# EAGLE board simulation file (EAGLE 9.7.0)

Size 248.9 x 140.5 mm. Coordinates in mm from the lower left corner, seen from the top.
Outline: 0,0 248.9,0 248.9,140.5 0,140.5 0,0
Copper layers (1*16): Top 0.035mm / dielectric 1.5mm / Bottom 0.035mm
Design rules "default": minimum track width 6mil, minimum drill 0.35mm, track to track 6mil, track to pad 6mil, pad to pad 6mil, via to via 6mil, smd to smd 6mil, copper to edge 40mil, drill to drill 6mil, minimum pad ring 10mil, minimum via ring 8mil, stop-mask expansion 4mil, vias tented up to drill 0mil, thermal gap 10mil

## Footprints (pad centres in the part's own frame; a part is rotated, then mirrored left to right if it is on the bottom)
DIODE-AXIAL = drill 1: 1 -5.08,0; 2 5.08,0
LEDRD254W60D565H860B_G = drill 0.981 pad 1.581: 1 -1.27,0; 2 1.27,0
HC-SR04 = drill 1.016 long: 1 -3.81,0; 2 -1.27,0; 3 1.27,0; 4 3.81,0
MOTOR = drill 1.118 pad 3.15 octagon: + 2.54,0; - -2.54,0
RESAD1016W63L850D250B = drill 0.83 pad 1.43: 1 -5.08,0; 2 5.08,0
SEN-13322 = drill 1.016 long: 1 -2.54,0; 2 0,0; 3 2.54,0
SG90 = drill 1.016 long: 1 -2.54,0; 2 0,0; 3 2.54,0
TO92 = drill 0.813 octagon: 1 -1.27,0; 2 0,1.905; 3 1.27,0
ARDUINO-UNO-R3-SHIELD = drill 1.016 pad 1.88: 3.3V 24.13,-2.54; 5V 24.13,0; A0 24.13,12.7; A1 24.13,15.24; A2 24.13,17.78; A3 24.13,20.32; A4 24.13,22.86; A5 24.13,25.4; AREF -24.13,-13.97; D2 -24.13,20.32; D3 -24.13,17.78; D4 -24.13,15.24; D5 -24.13,12.7; D6 -24.13,10.16; D7 -24.13,7.62; D8 -24.13,3.81; D9 -24.13,1.27; D10 -24.13,-1.27; D11 -24.13,-3.81; D12 -24.13,-6.35; D13 -24.13,-8.89; GND@0 24.13,2.54; GND@1 24.13,5.08; GND@2 -24.13,-11.43; IOREF 24.13,-7.62; NC 24.13,-10.16; RES 24.13,-5.08; RX -24.13,25.4; SCL -24.13,-19.05; SDA -24.13,-16.51; TX -24.13,22.86; VIN 24.13,7.62

## Placement (x,y rotation side)
D1  DIODEDIODE-AXIAL  [DIODE-AXIAL]  85.92,10.04 270 top
D3  GREEN  [LEDRD254W60D565H860B_G]  138.96,59.34 180 top
DIST1  DISTANCE-SENSOR-4PINHC-SR04  [HC-SR04]  35.98,22.23 0 top
M1  MOTOR_HDR  [MOTOR]  75.73,28.35 0 top
R1  1k  [RESAD1016W63L850D250B]  109.43,39.79 90 top
R2  1k  [RESAD1016W63L850D250B]  142.7,41.03 90 top
SEN1  SEN-13322  [SEN-13322]  209.15,131.61 0 top
SEN2  SEN-13322  [SEN-13322]  241.92,134.15 0 top
SERVO1  SERVOSG90  [SG90]  133.16,27.81 0 top
T1  NPN  [TO92]  100.69,43.11 0 top
U1  ARDUINO-UNO-R3-SHIELD  [ARDUINO-UNO-R3-SHIELD]  47.88,80.55 270 top
U2  TMP36GT9Z_TO92  [TO92]  184.89,106.21 0 top

## Library data of the parts
D1 DIST1 M1 R1 R2 SEN1 SEN2 SERVO1 U1 U2 = Tinkercad
D3 = Tinkercad; CATEGORY: Opto-Electronic; SUB-CATEGORY: LED; VALUE: LED_GREEN
T1 = Tinkercad; CATEGORY: Transistor; SUB-CATEGORY: BJT; TYPE: NPN

## Nets
D3_A: D3.1 R2.1
M1_-: D1.1 M1.- T1.1
T1_B: R1.1 T1.2
U1_5V: DIST1.1 M1.+ SEN1.1 SEN2.2 SERVO1.2 U1.5V U2.3
U1_A0: SEN1.3 U1.A0
U1_A1: U1.A1 U2.2
U1_A2: SEN2.3 U1.A2
U1_D4: R2.2 U1.D4
U1_D7: R1.2 U1.D7
U1_D9: SERVO1.3 U1.D9
U1_D10: DIST1.2 U1.D10
U1_D11: DIST1.3 U1.D11
U1_GND: D1.2 D3.2 DIST1.4 SEN1.2 SEN2.1 SERVO1.1 T1.3 U1.GND@0 U1.GND@1 U1.GND@2 U2.1

## Tracks (layer width: path | path; a pad name or v marks a point on that pad's centre or on a via)
D3_A  (1 unrouted)
M1_-  (2 unrouted)
T1_B  (1 unrouted)
U1_5V  (6 unrouted)
U1_A0  (1 unrouted)
U1_A1  (1 unrouted)
U1_A2  (1 unrouted)
U1_D4  (1 unrouted)
U1_D7  (1 unrouted)
U1_D9  (1 unrouted)
U1_D10  (1 unrouted)
U1_D11  (1 unrouted)
U1_GND  (10 unrouted)